# Altium PCB bluienrg.PcbDoc
Units mm, origin at the board's own origin, x right, y up, seen from the top; angles counter-clockwise.
Board outline 38.98 x 29.99 mm, 2 copper layers (Top Layer, Bottom Layer), stack 0.871 mm thick; 65 components, 38 nets, 201 pads, 216 vias.
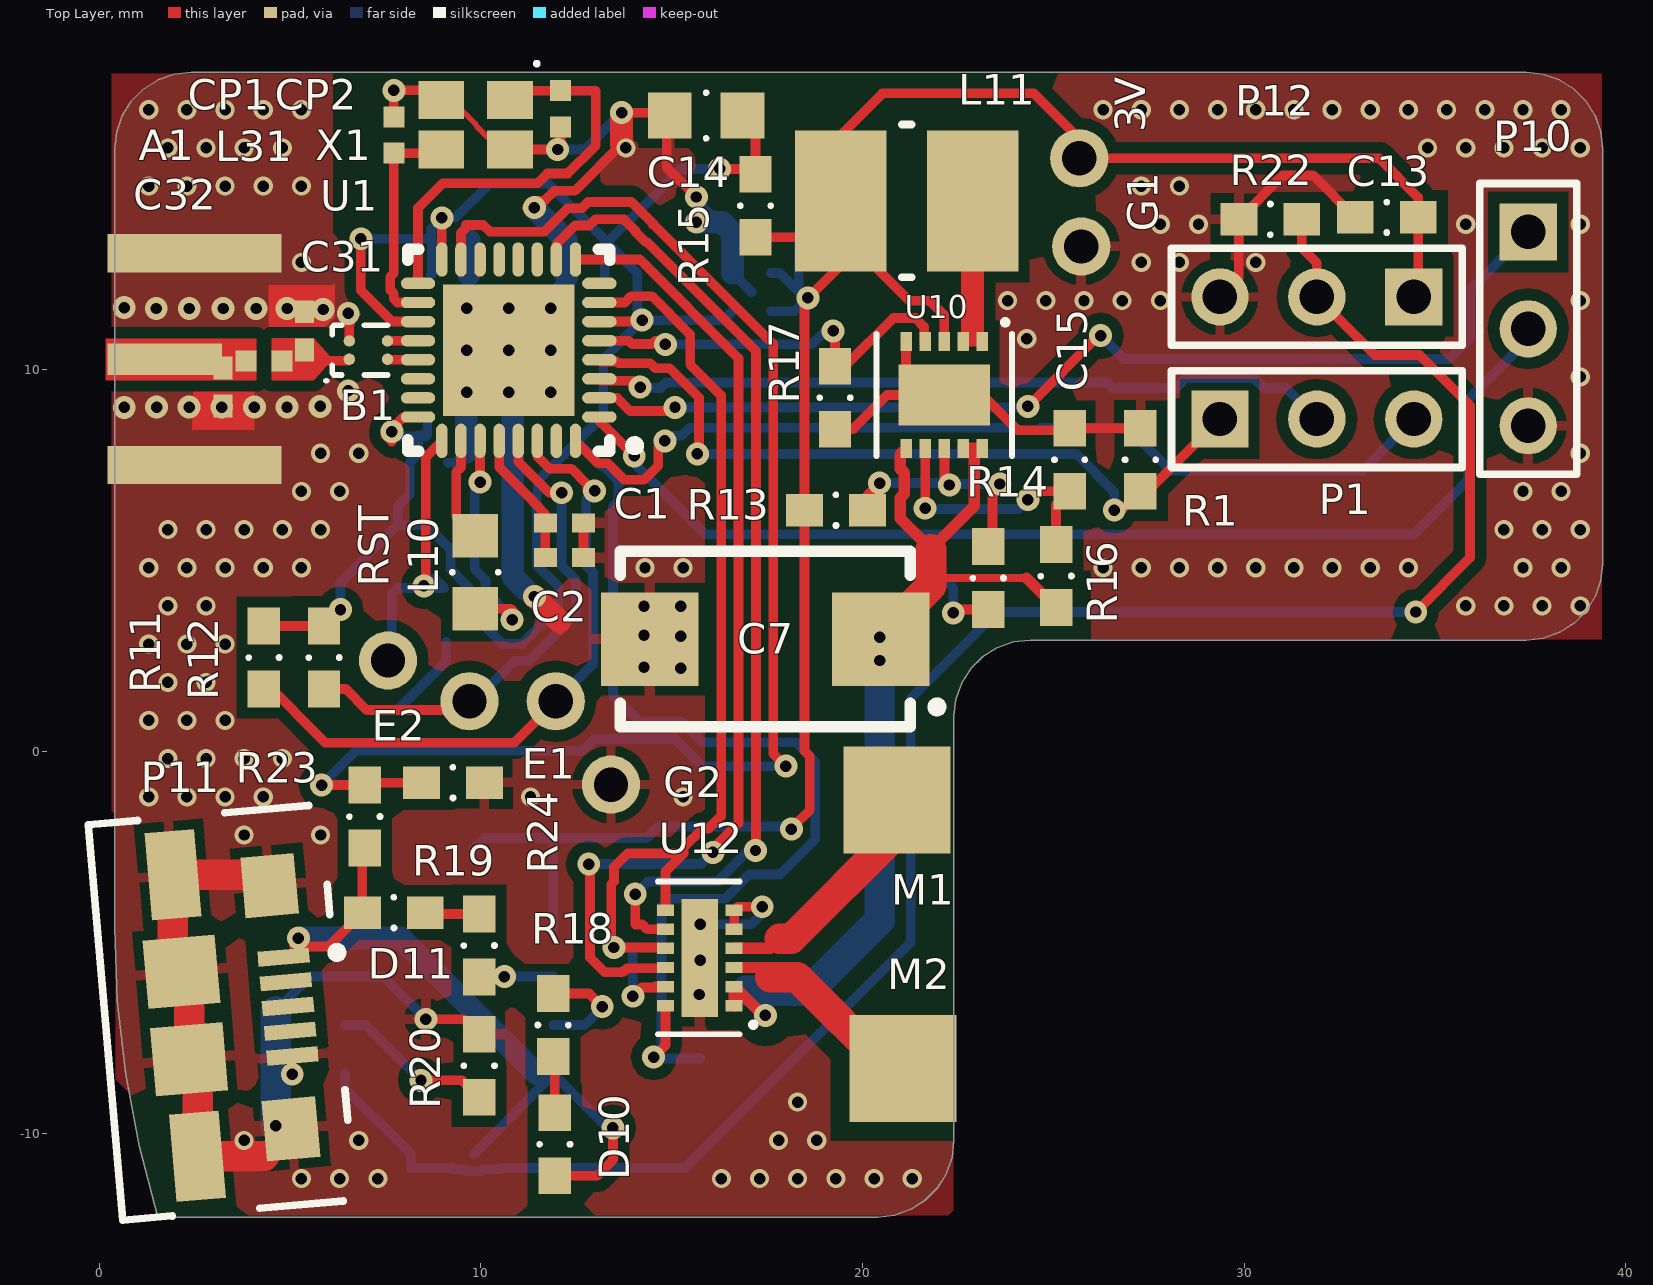
[diagram p0: Top Layer view]
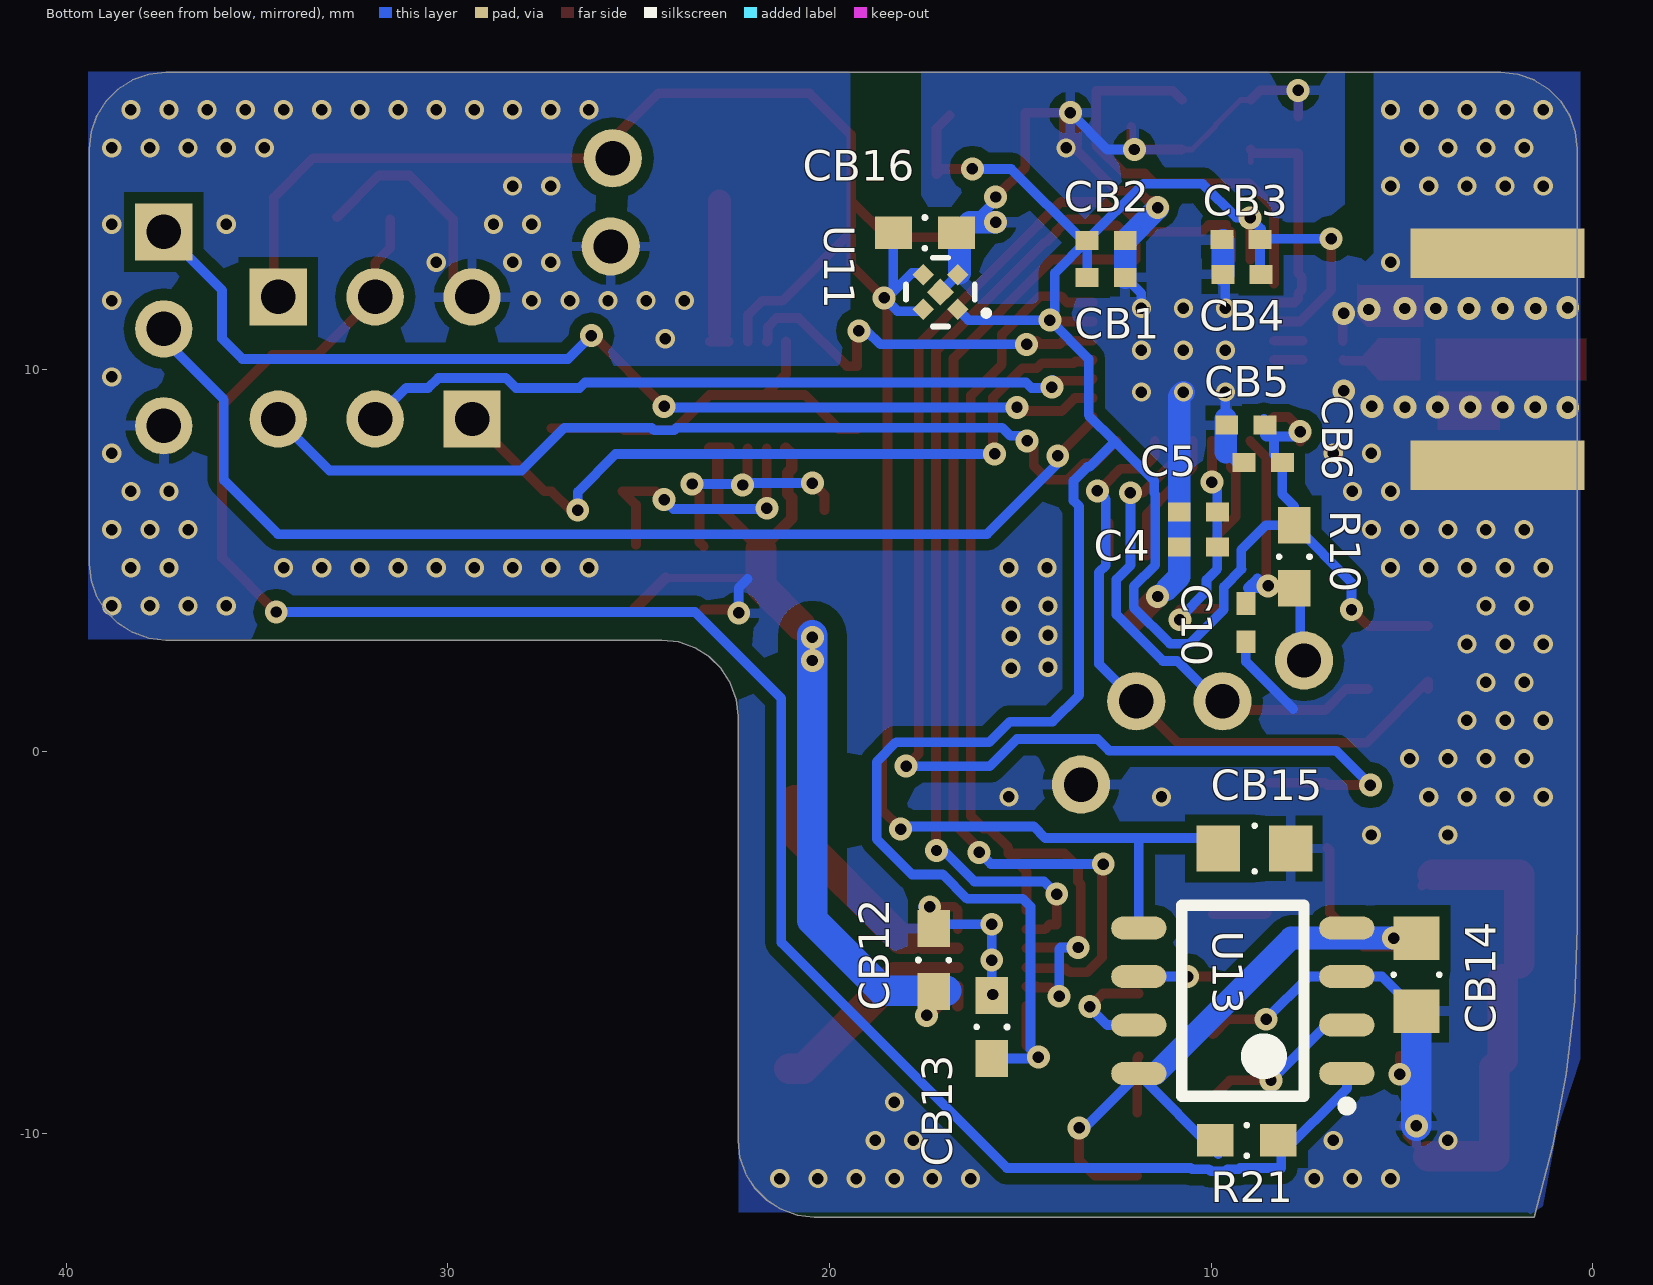
[diagram p1: Bottom Layer view, seen from below]

## Layer stack, top to bottom
Top Solder: solder mask 0.0102, Solder Resist, Dk 3.5
Top Layer: signal copper 0.0356
Dielectric 1: core 0.8, FR-4, Dk 4.31
Bottom Layer: signal copper 0.0356
Bottom Solder: solder mask 0.0102, Solder Resist, Dk 3.5

## Board outline
39.388,15.793 39.337,16.239 39.19,16.661 38.951,17.04 38.635,17.357 38.255,17.595 37.833,17.743 37.388,17.793 2.41,17.793 1.965,17.743 1.542,17.595 1.163,17.357 0.847,17.04 0.608,16.661 0.46,16.239 0.41,15.793 0.41,-4.617 0.481,-6.537 0.694,-8.446 1.047,-10.334 1.538,-12.192 20.396,-12.192 20.841,-12.141 21.264,-11.993 21.643,-11.755 21.959,-11.439 22.198,-11.059 22.346,-10.637 22.396,-10.192 22.396,0.923 22.446,1.368 22.594,1.791 22.832,2.17 23.149,2.487 23.528,2.725 23.951,2.873 24.396,2.923 37.388,2.923 37.833,2.974 38.255,3.122 38.635,3.36 38.951,3.676 39.19,4.056 39.337,4.478 39.388,4.923

## Design rules (kind name [scope] priority, off if disabled: settings)
Clearance Clearance_10 [HasFootprint('RT9078') vs HasFootprint('RT9078')] p1: gap=0.18 ignorepadtopadclearanceinfootprint=FALSE
Clearance Clearance_5 [HasFootprint('BALF-NRG') vs InPolygonClass('All Polygons')] p2: gap=0.5 ignorepadtopadclearanceinfootprint=FALSE
Clearance Clearance_6 [InNet('NetA1_ANT') vs InPolygonClass('All Polygons')] p3: gap=0.3 ignorepadtopadclearanceinfootprint=FALSE
Clearance Clearance_7 [InNetClass('HC') vs InPolygonClass('All Polygons')] p4: gap=0.5 ignorepadtopadclearanceinfootprint=FALSE
Clearance Clearance_9 [All vs InPolygonClass('All Polygons')] p5: gap=0.3 ignorepadtopadclearanceinfootprint=FALSE
Clearance Clearance_1 [InNet('NetA1_ANT')] p6: gap=0.1 ignorepadtopadclearanceinfootprint=FALSE
Clearance [InNetClass('RFB')] p7: gap=0.1 ignorepadtopadclearanceinfootprint=FALSE
Clearance Clearance_4 [HasFootprint('BALF-NRG')] p8: gap=0.2 ignorepadtopadclearanceinfootprint=FALSE
Clearance Clearance_3 [HasFootprint('MSOP-8')] p9: gap=0.2 ignorepadtopadclearanceinfootprint=FALSE
Clearance Clearance_2 [HasFootprint('BLUENRG-1')] p10: gap=0.15 ignorepadtopadclearanceinfootprint=FALSE
Clearance Clearance_8 [All] p11: gap=0.2 ignorepadtopadclearanceinfootprint=FALSE
MaxMinImpedance [InNetClass('AN')] p1: minimum=45.00 maximum=55.00
MinimumSolderMaskSliver MinimumSolderMaskSliver_3 [HasFootprint('RT9078') vs HasFootprint('RT9078')] p1: minsoldermaskwidth=0.18
MinimumSolderMaskSliver MinimumSolderMaskSliver_2 [HasFootprint('BALF-NRG')] p2: minsoldermaskwidth=0.02
MinimumSolderMaskSliver [HasFootprint('16MHZ_25_20')] p3: minsoldermaskwidth=0.12
MinimumSolderMaskSliver MinimumSolderMaskSliver_1 [All] p4: minsoldermaskwidth=0.195
PolygonConnect PolygonConnect_1 [HasFootprint('BlueNRG-1')] p1: connectstyle=Direct reliefconductorwidth=0.254 reliefentries=4 polygonreliefangle="90 Angle" airgapwidth=0.254
PolygonConnect PolygonConnect_4 [HasFootprint('sma')] p2: connectstyle=Direct reliefconductorwidth=0.254 reliefentries=4 polygonreliefangle="90 Angle" airgapwidth=0.254
PolygonConnect PolygonConnect_3 [IsShieldingVia] p3: connectstyle=Direct reliefconductorwidth=0.254 reliefentries=4 polygonreliefangle="90 Angle" airgapwidth=0.254
PolygonConnect PolygonConnect_2 [IsStitchingVia] p4: connectstyle=Direct reliefconductorwidth=0.254 reliefentries=4 polygonreliefangle="90 Angle" airgapwidth=0.254
PolygonConnect [All] p5: connectstyle=Relief reliefconductorwidth=0.254 reliefentries=4 polygonreliefangle="90 Angle" airgapwidth=0.254
RoutingCorners [InNetClass('AN')] p1: cornerstyle=Round minsetback=2.54 maxsetback=2.54
RoutingCorners RoutingCorners_1 [All] p2: cornerstyle=45-Degree minsetback=2.54 maxsetback=2.54
RoutingVias [All] p1: holewidth=0.3 width=0.6 viastyle="Through Hole" minholewidth=0.3 minwidth=0.6 maxholewidth=0.3 maxwidth=0.6
SMDNeckDown [InNet('NetA1_ANT')] p1: percent=600.000
SignalStimulus [All] p1: kind=1 level=0 starttime=10.00n stoptime=60.00n periodtime=100.00n
SilkToSilkClearance [All] p1: silktosilkclearance=0.19
SilkToSolderMaskClearance SilkToSolderMaskClearance_1 [HasFootprint('MY_0603')] p1: minsilkscreentomaskgap=0.1 clearancetoexposedcopper=TRUE
SilkToSolderMaskClearance SilkToSolderMaskClearance_2 [HasFootprint('MY_0805')] p2: minsilkscreentomaskgap=0.1 clearancetoexposedcopper=TRUE
SilkToSolderMaskClearance [IsPad] p3: minsilkscreentomaskgap=0.2 clearancetoexposedcopper=TRUE
SolderMaskExpansion [All] p1: expansion=0.102
SupplyNets SupplyNets_1 [InNet('VCC')] p1: voltage=3.000
SupplyNets [InNet('12V')] p2: voltage=12.00
Width [InNet('NetA1_ANT')] p1: maxlimit=1.706 minlimit=-0.044 preferedwidth=1.243 toplayer_minwidth=0.037 bottomlayer_maxwidth=-0.042 bottomlayer_prefwidth=-0.043 impedancedriven=TRUE minimp=40.000000 maximp=140.000000 favimp=50.000000
Width Width_2 [InNetClass('HC')] p2: maxlimit=0.8 minlimit=0.15 preferedwidth=0.3
Width Width_1 [All] p3: maxlimit=0.8 minlimit=0.15 preferedwidth=0.254
26 further rules are at their usual default settings.

## Classes and differential pairs
net class HC: 5V NetM1_1 NetM2_1
net class AN: NetA1_ANT NetB1_AN
net class RFB: NetB1_RF0 NetB1_RF1

## Components (designator, comment, footprint, x,y, rotation, side; value= is the part's Value field where it differs from the comment)
3V "ENC" MY_PAD 25.679,15.545 r0 top
A1 "ANTENNA" sma 2.5,10.281 r270 top
B1 "BALF-NRG" BALF-NRG 7.555,10.719 r180 top
C1 "100p C0G" 0402 12.192,5.994 r180 top value=100pF
C2 "100n" 0402 12.192,5.08 r180 top value=100pF
C4 "100n" 0402 10.338,5.359 r180 bottom value=100pF
C5 "1u" 0402 10.338,6.274 r180 bottom value=100pF
C7 "100uF" 100uf_tant 17.45,2.946 r180 top
C10 "100n" 0402 9.093,3.378 r90 bottom value=100pF
C13 "1u" MY_0603 33.731,13.995 r0 top value=100pF
C14 "10u" MY_0805 15.9,16.662 r0 top value=100pF
C15 "100nF" MY_0603 25.425,7.645 r270 top value=100pF
C31 "1.2pF" 0402 5.385,11.024 r90 top value=100pF
C32 "1.2pF" 0402 3.251,9.55 r270 top value=100pF
CB1 "1u" 0402 12.751,12.421 r0 bottom value=100pF
CB2 "100n" 0402 12.751,13.386 r0 bottom value=100pF
CB3 "1u" 0402 9.22,13.411 r180 bottom value=100pF
CB4 "100n" 0402 9.195,12.497 r180 bottom value=100pF
CB5 "1u" 0402 9.093,8.56 r180 bottom value=100pF
CB6 "100n" 0402 8.636,7.569 r180 bottom value=100pF
CB12 "100n" MY_0603 17.272,-5.461 r270 bottom value=100pF
CB13 "100n" MY_0603 15.748,-7.214 r90 bottom value=100pF
CB14 "10uF" MY_0805 4.623,-5.842 r90 bottom value=100pF
CB15 "10uF" MY_0805 8.865,-2.54 r0 bottom value=100pF
CB16 "0.1u" MY_0603 17.501,13.589 r0 bottom value=100pF
CP1 "13pF C0G" MY_0402 7.722,16.154 r270 top value=100pF
CP2 "13pF C0G" MY_0402 12.09,16.84 r90 top value=100pF
D10 "LED2" MY_0603 11.938,-10.287 r90 top
D11 "LED2" MY_0603 7.722,-4.216 r0 top
E1 "ENC" MY_PAD 11.963,1.321 r0 top
E2 "ENC" MY_PAD 9.703,1.321 r0 top
G1 "ENC" MY_PAD 25.73,13.233 r0 top
G2 "ENC" MY_PAD 13.411,-0.864 r0 top
L10 "Inductor" MY_0805 9.855,4.699 r270 top value=10nH
L11 "Inductor" IND_4_4 21.158,14.427 r0 top value=2.2uH
L31 "Inductor" MY_0402 4.318,10.236 r180 top value=2.2nH
M1 "M1" MPAD 20.904,-1.27 r0 top
M2 "M2" MPAD 21.057,-8.306 r0 top
P1 "DBG" HDR1X3 29.362,8.712 r0 top
P10 "SWD" HDR1X3 37.44,13.614 r270 top
P11 "USBmicroAB" 1981584 0.864,-7.036 r185 top
P12 "BAT" HDR1X3 34.442,11.913 r180 top
R1 "4.7k" MY_0603 27.28,7.645 r270 top value=4.7K
R10 "4.7k" MY_0603 7.823,5.105 r90 bottom value=4.7K
R11 "4.7k" MY_0603 4.318,2.464 r90 top value=4.7K
R12 "4.7k" MY_0603 5.893,2.464 r90 top value=4.7K
R13 "0R" MY_0603 19.304,6.325 r0 top value=4.7K
R14 "0R" MY_0603 23.292,4.547 r90 top value=4.7K
R15 "0R" MY_0603 17.196,14.3 r270 top value=4.7K
R16 "100R" MY_0603 25.07,4.597 r90 top value=4.7K
R17 "4.7k" MY_0603 19.279,9.271 r90 top value=4.7K
R18 "4.7k" MY_0603 11.894,-7.163 r270 top value=4.7K
R19 "4.7k" MY_0603 9.957,-5.08 r90 top value=4.7K
R20 "2.2k" MY_0603 9.957,-8.23 r90 top value=4.7K
R21 "4.7k" MY_0603 9.068,-10.185 r180 bottom value=4.7K
R22 "56k" MY_0603 30.683,13.945 r180 top value=4.7K
R23 "56k" MY_0603 6.96,-1.702 r90 top value=4.7K
R24 "56k" MY_0603 9.271,-0.813 r0 top value=4.7K
RST "M1" MY_PAD 7.569,2.388 r0 top
U1 "BlueNRG-1" BlueNRG-1 10.73,10.516 r180 top
U10 "MAX8815A" PDQN10 23.139,10.744 r180 top
U11 "RT9078" RT9078 17.094,12.04 r0 bottom
U12 "DRV8839DSSR" DRV8839 16.637,-6.655 r90 top
U13 "TP4056" MY_SOIC8N 9.169,-6.528 r0 bottom
X1 "16MHZ" 16MHZ_25_20 9.866,16.423 r180 top

## Footprints (in the part's own frame and the unit in brackets; to place one, negate y for a bottom-side part, rotate by r counter-clockwise, add the part's x,y. Pads: shape width x height; smd on the part's side, far side on the other; paste and mask are expansions set on the pad)
16MHZ_25_20 [mm] "DFN, 4-Leads, Body 2.00x2.50mm, Pitch 1.70mm, IPC Medium Density"
  rect 1.2x1 smd mask+0.08: G1(0.9,-0.65) G2(-0.9,0.65) XT1(-0.9,-0.65) XT2(0.9,0.65)
  silkscreen extent -1.65,-1.65 -1.55,-1.55, body extent -1.3,-1.05 1.3,1.05, height 0.5
100uf_tant [mm]
  rect 2.55x2.45 smd: +(-3.025,0) -(3.025,0)
  silkscreen extent -4.63,-2.3 3.8,2.3, body extent -3.8,-2.3 3.8,2.3, height 2.8
0402 [mm] "Chip Capacitor, Body 1.0x0.5mm, IPC High Density"
  rect 0.6x0.5 smd: 1(-0.5,0) 2(0.5,0)
  body extent -0.55,-0.3 0.55,0.3, height 1.3
1981584 [mm] "Connector; USB2.0, Type B, SM; 5 Position; Right Angle"
  rect 1.35x0.4 smd mask+0: 1(-4.1,-1.3) 2(-4.1,-0.65) 3(-4.1,0) 4(-4.1,0.65) 5(-4.1,1.3)
  rect 1.4x1.6 smd: 6(-3.9,3.2) 8(-3.9,-3.2)
  rect 1.3x2.3 smd: 7(-1.4,3.7) 9(-1.4,-3.7)
  rect 1.9x1.8 smd: 10(-1.4,1.15) 11(-1.4,-1.15)
  silkscreen extent -5.62,-5.2 0.7,5.2, body extent -5.2,-5 0.6,4.95, height 3.9
BALF-NRG [mm]
  round 0.3 smd paste+0.1 mask+0.1: AN(1,0.44) G(1,-0.04) RF0(0,0.44) RF1(0,-0.04)
  silkscreen extent 0,-0.45 1.61,1
BlueNRG-1 [mm] "QFN, 32-Leads, Body 5.00x5.00mm, Pitch 0.50mm, Thermal Pad 3.45x3.45mm, IPC Medium Density"
  oval 0.9x0.3 smd: 1(-2.375,1.75) 2(-2.375,1.25) 3(-2.375,0.75) 4(-2.375,0.25) 5(-2.375,-0.25) 6(-2.375,-0.75) 7(-2.375,-1.25) 8(-2.375,-1.75) 17(2.375,-1.75) 18(2.375,-1.25) 19(2.375,-0.75) 20(2.375,-0.25) 21(2.375,0.25) 22(2.375,0.75) 23(2.375,1.25) 24(2.375,1.75)
  oval 0.3x0.9 smd: 9(-1.75,-2.375) 10(-1.25,-2.375) 11(-0.75,-2.375) 12(-0.25,-2.375) 13(0.25,-2.375) 14(0.75,-2.375) 15(1.25,-2.375) 16(1.75,-2.375) 25(1.75,2.375) 26(1.25,2.375) 27(0.75,2.375) 28(0.25,2.375) 29(-0.25,2.375) 30(-0.75,2.375) 31(-1.25,2.375) 32(-1.75,2.375)
  rect 3.45x3.45 smd: 33(0,0)
  silkscreen extent -3.42,-2.65 2.65,2.65, body extent -2.5,-2.5 2.5,2.5, height 0.8
DRV8839 [mm]
  rect 0.3x0.45 smd mask+0: EN1(1.5,1.8) EN2(2.5,1.8) G1(2,0) G2(2.5,0) IN1(1,1.8) IN2(2,1.8) nSLEEP(0.5,1.8) OUT1(1,0) OUT2(1.5,0) VCC(0,1.8) VM1(0,0) VM2(0.5,0)
  rect 3.1x0.95 smd mask+0: PG(1.25,0.9)
  silkscreen extent -0.75,-0.51 3.25,2
HDR1X3 [mm] "Connector; Header; 3 Position"
  rect 1.5x1.5 hole 0.9: 1(0,0)
  round 1.5 hole 0.9: 2(2.54,0) 3(5.08,0)
  silkscreen extent -1.27,-1.27 6.35,1.27
IND_4_4 [mm]
  rect 2.4x3.7 smd: 1(-1.725,0) 2(1.725,0)
  silkscreen extent -0.13,-2 0.12,2, body extent -2.27,-2 2.27,2, height 2.5
MPAD [mm]
  rect 2.8x2.8 smd: 1(0,0)
MY_0402 [mm] "Chip Resistor, 2-Leads, Body 1.00x0.50mm, IPC Medium Density"
  rect 0.55x0.55 smd mask+0: 1(-0.475,0) 2(0.475,0)
  body extent -0.5,-0.25 0.5,0.25, height 0.5
MY_0603 [mm] "0603 without silkscreen issues"
  rect 0.965x0.85 smd: 1(-0.825,0) 2(0.825,0)
  silkscreen extent -0.01,-0.41 0.01,0.41, body extent -0.8,-0.4 0.8,0.4, height 3
MY_0805 [mm] "0805 without silkscreen issues"
  rect 1.14x1.2 smd: 1(-0.955,0) 2(0.955,0)
  silkscreen extent -0.01,-0.61 0.01,0.61, body extent -1,-0.6 1,0.6, height 4
MY_PAD [mil]
  round 60 hole 35.43: 1(0,0)
MY_SOIC8N [mm]
  oval 1.45x0.6 smd: 1(-2.725,1.905) 2(-2.725,0.635) 3(-2.725,-0.635) 4(-2.725,-1.905) 5(2.725,-1.905) 6(2.725,-0.635) 7(2.725,0.635) 8(2.725,1.905)
  silkscreen extent -2.85,-2.5 1.6,2.88, body extent -2,-2.5 2,2.5, height 2.65
PDQN10 [mm]
  rect 0.3x0.5 smd mask+0: 1(0,0) 2(0.5,0) 3(1,0) 4(1.5,0) 5(2,0) 6(2,2.8) 7(1.5,2.8) 8(1,2.8) 9(0.5,2.8) 10(0,2.8)
  rect 2.4x1.6 smd mask+0: 11(1,1.4)
  silkscreen extent -0.77,-0.51 2.77,3
RT9078 [mm] "DFN, 4-Leads, Body 1.00x1.00mm, Pitch 0.63mm, IPC Medium Density"
  rect 0.4x0.4 smd rot 45 mask+0: EN(0.45,-0.45) GND(-0.45,-0.45) VIN(0.45,0.45) VOUT(-0.45,0.45)
  rect 0.5x0.5 smd rot 45 mask+0: SGND(0,0)
  silkscreen extent -1.25,-0.9 0.9,0.9, body extent -0.5,-0.5 0.5,0.5, height 0.45
sma [mm]
  rect 0.82x3 smd: ANT(0,-0.78)
  rect 1x4.56 smd: G1(-2.775,0) G2(2.775,0)
  rect 1.3x4.56 smd far side: G1(-2.775,0) G2(2.775,0)

## Part data
3V E1 E2 G1 G2 M1 M2 RST: library part Socket, "Socket", LatestRevisionDate=17-Jul-2002, LatestRevisionNote="Re-released for DXP Platform.", Publisher="Altium Limited"
C1 C2 C4 C5 C10 C13 C14 C15 C31 C32 CB1 CB2 CB3 CB4 CB5 CB6 CB12 CB13 CB14 CB15 CB16 CP1 CP2: library part "Cap Semi", "Capacitor (Semiconductor SIM Model)", LatestRevisionDate=29-May-2009, LatestRevisionNote="IPC-7351 Footprint Added.", PackageDescription="Chip Capacitor", PackageReference=C1206, Published=8-Jun-2000, Publisher="Altium Limited"
C7: library part C_TANT
D10 D11: "Typical RED, GREEN, YELLOW, AMBER GaAs LED", LatestRevisionDate=17-Jul-2002, LatestRevisionNote="Re-released for DXP Platform.", PackageDescription="SM LED; 2 Flat Leads", PackageReference=3.2X1.6X1.1, PackageVersion=Feb-2002, Published=8-Jun-2000, Publisher="Altium Limited"
P1 P10 P12: library part "Header 3", "Header, 3-Pin", LatestRevisionDate=17-Jul-2002, LatestRevisionNote="Re-released for DXP Platform.", Publisher="Altium Limited"
R1 R10 R11 R12 R13 R14 R15 R16 R17 R18 R19 R20 R21 R22 R23 R24: library part Res3, "Resistor", LatestRevisionDate=29-May-2009, LatestRevisionNote="IPC-7351 Footprint Added.", PackageDescription="Chip Resistor", PackageReference=J1-0603, Published=8-Jun-2000, Publisher="Altium Limited"
U1: Supplier Part Number 1=2785121, Supplier 1=Farnell
X1: library part XTAL_4PIN
L10 L11 L31: Code_IEC=1005, Code_JEITA=0402, LatestRevisionDate=29-May-2009, LatestRevisionNote="IPC-7351 Footprint Added.", PackageDescription="Chip Inductor", PackageReference=0402-A, Published=8-Jun-2000, Publisher="Altium Limited"

## Via types
v1: diameter 0.5, hole 0.3, Top Layer to Bottom Layer, tented both sides, 130 vias
v2: diameter 0.6, hole 0.3, Top Layer to Bottom Layer, tented both sides, 77 vias
v3: diameter 0.5, hole 0.3, Top Layer to Bottom Layer, 9 vias

## Nets (pads, with @x,y where several pads share a name; then routed paths per layer and width w, separated by ;. In a path a pad name is that pad's centre, name@x,y a point inside that pad or via, vN(x,y) a via of type N, cw(c..) or ccw(c..) an arc to the next point about the centre after c; other vN are vias at no path point)
5V: C7.+ CB12.2 R16.1 U10.6 U10.9 U10.10 U12.VM1 U12.VM2 | length 27.3
  Top Layer w0.16: 21.793,4.341 21.793,4.547
  Top Layer w0.2: 21.793,4.547 24.296,4.547
  Top Layer w0.3: U12.VM1 U12.VM2 17.456,-6.974 v2(17.456,-6.909) ; U10.6 20.989,7.794 20.989,7.413 21.097,7.305 21.097,6.754 20.989,6.646 20.989,6.108 21.793,5.304 22.926,6.436 22.926,7.899 ; U10.9 U10.10 ; 24.296,4.547 R16.1
  Top Layer w0.8: C7.+@20.766,3.313 21.793,4.341 ; 21.793,4.484 21.793,5.304
  Bottom Layer w0.3: CB12.2@16.942,-6.261 17.59,-6.909 v2(17.456,-6.909)
  Bottom Layer w0.8: CB12.2@16.942,-6.261 18.605,-6.261 20.447,-4.419 v2@20.447,3.048
  other v2: 20.447,2.388 20.447,2.995
BL_ENTER: P1.1 R1.2 U1.4 | length 20.1
  Top Layer w0.254: U1.4 13.151,10.22 13.555,10.22 13.601,10.174 13.91,10.174 13.913,10.177 14.437,10.177 14.574,10.041 14.95,10.041 15.715,9.277 15.715,7.841 v2(15.672,7.798) ; v2(26.594,6.325) 26.784,6.325 R1.2 27.471,6.82 P1.1
  Bottom Layer w0.254: v2(15.672,7.798) 25.603,7.798 26.594,6.807 v2(26.594,6.325)
BL_RXD: P1.3 U1.32 | length 24.3
  Top Layer w0.254: U1.32 13.069,7.552 13.329,7.552 13.761,7.12 14.281,7.12 14.648,7.487 14.648,7.968 v2(14.821,8.141)
  Bottom Layer w0.254: v2(14.821,8.141) 14.951,8.271 15.258,8.271 15.471,8.484 24.005,8.484 24.073,8.415 24.593,8.415 24.661,8.484 26.949,8.484 28.067,7.366 33.096,7.366 P1.3
BL_TXD: P1.2 U1.3 | length 19.9
  Top Layer w0.254: U1.3 13.151,9.72 14.004,9.72 v2(14.173,9.55)
  Bottom Layer w0.254: v2(14.173,9.55) 14.173,9.703 14.148,9.728 14.158,9.738 14.371,9.525 14.709,9.525 14.853,9.669 26.406,9.669 26.55,9.525 28.213,9.525 28.477,9.789 30.248,9.789 30.512,9.525 31.09,9.525 P1.2
CHR: R23.2 R24.1 U1.15 | length 37.8
  Top Layer w0.254: v2(5.83,-0.877) R23.2 7.024,-0.813 R24.1 ; U1.15 9.48,13.594 9.607,13.721 9.607,13.798 10.06,13.798 10.236,13.622 11.664,13.622 12.28,14.238 12.65,14.238 12.81,14.399 13.941,14.399 14.509,13.831 14.509,13.799 14.541,13.799 17.661,10.679 17.661,-0.051 v2(17.991,-0.381)
  Bottom Layer w0.254: v2(5.83,-0.877) 6.732,0.025 12.675,0.025 12.979,0.33 15.088,0.33 15.799,-0.381 v2(17.991,-0.381)
E1: E1.1 R11.1 U1.30 | length 17.4
  Top Layer w0.254: R11.1 4.318,1.844 5.93,0.232 10.874,0.232 E1.1 ; U1.30 11.48,7.736 11.803,7.414 12.371,7.414 12.788,6.996 12.788,6.833 v2(12.979,6.833)
  Bottom Layer w0.254: E1.1 12.94,2.297 12.94,4.7 12.762,4.878 12.762,6.615 v2(12.979,6.833)
E2: E2.1 R12.1 U1.29 | length 13.6
  Top Layer w0.254: R12.1 6.464,1.639 7.01,1.092 9.474,1.092 E2.1 ; U1.29 10.98,7.594 11.793,6.782 v2(12.116,6.782)
  Bottom Layer w0.254: E2.1 E2.1@9.835,1.321 ; E2.1@10.236,1.321 E2.1@9.835,1.321 ; v2(12.116,6.782) 12.116,4.882 12.486,4.512 12.486,3.591 11.268,2.373 10.887,2.373 E2.1@9.835,1.321
EN: R17.2 U1.5 U10.4 | length 10.7
  Top Layer w0.254: U1.5 13.875,10.766 13.964,10.676 14.484,10.676 14.573,10.766 14.736,10.766 v2(14.834,10.668) ; v2(19.228,11.024) 19.279,10.973 R17.2 19.545,10.096 20.806,11.357 21.389,11.357 21.616,11.13 21.616,10.767 U10.4
  Bottom Layer w0.254: v2(14.834,10.668) 18.669,10.668 19.025,11.024 v2(19.228,11.024)
GND: A1.G1 A1.G2 B1.G C1.1 C2.1 C4.1 C5.1 C7.- C10.1 C13.1 C14.1 C15.1 C31.2 C32.2 CB1.1 CB2.1 CB3.1 CB4.1 CB5.1 CB6.1 CB12.1 CB13.2 CB14.1 CB15.1 CB16.1 CP1.1 CP2.1 G1.1 G2.1 P10.3 P11.5 P11.6 P11.7 P11.8 P11.9 P11.10 P11.11 P12.3 R1.1 R14.1 R17.1 R20.2 R22.2 R24.2 U1.33 U10.5 U10.11 U11.GND U11.SGND U12.G1 U12.G2 U12.PG U13.3 X1.G1 X1.G2 | length 85.5
  Top Layer w0.15: X1.G1 9.231,17.073 9.862,16.443 ; 9.895,16.379 10.501,15.773 X1.G2
  Top Layer w0.254: P11.11@1.936,-5.546 P11.11 P11.11@2.359,-5.969 ; P11.10 P11.10@2.581,-8.282 ; P11.8@4.19,-3.228 P11.8 ; 4.312,-10.6 P11.6@4.865,-10.046 ; v2(4.623,-9.804) P11.6@4.948,-9.804 ; v2(5.061,-8.451) P11.5 ; B1.G 6.555,11.204 v2@6.579,11.227 ; CP1.1 v2(7.722,17.323) 8.717,17.323 X1.G1 ; v2(8.56,-7.01) 9.563,-7.01 R20.2 ; X1.G2 v2(12.014,15.773) 12.09,15.85 CP2.1 ; v2(11.405,14.249) 11.201,14.249 11.385,14.433 11.671,14.433 11.931,14.692 12.462,14.692 v1@13.691,15.921 ; 12.065,3.2 12.065,3.404 ; C2.1@12.692,5.131 C1.1 ; v2(13.691,16.739) 14.869,16.739 14.869,15.306 v2(15.646,14.529) ; v2(15.748,-5.461) U12.PG@15.748,-5.416 ; U12.G1 U12.G2 16.728,-4.064 v2(17.374,-4.064) ; R17.1 19.749,8.446 20.647,9.344 U10.11@21.682,9.344 ; U10.5 21.139,9.887 U10.11@21.682,9.344 ; v2(22.377,3.632) 22.377,3.683 22.416,3.722 R14.1 ; R1.1 C15.1 25.37,8.415 24.073,8.415 23.145,9.344 U10.11 U10.11@21.682,9.344 ; P12.3 29.858,12.408 R22.2 31.004,15.091 31.811,15.091 C13.1
  Top Layer w0.6: v2(11.405,4.064) 12.065,3.404 ; v1@13.691,15.921 v2(13.691,16.739)
  Top Layer w0.8: P11.11@1.936,-5.546 P11.9 P11.8@4.19,-3.228 ; P11.10 P11.11@2.359,-5.969 ; P11.10@2.581,-8.282 P11.7 4.312,-10.6
  Bottom Layer w0.254: 4.623,-8.89 v2(5.061,-8.451) ; CB14.1 5.527,-5.893 U13.3 7.442,-5.893 v2(8.56,-7.01) ; 7.849,1.118 9.093,2.362 C10.1 ; CB6.1 9.339,7.569 9.619,7.849 ; CB5.1@9.619,8.712 9.63,8.724 v3(9.63,9.416) ; v3(9.63,11.616) 9.63,12.432 CB4.1 ; CB3.1@9.695,13.386 CB3.1 ; v2@11.176,4.242 11.354,4.064 v2(11.405,4.064) ; v2@11.405,14.232 v2(11.405,14.249) ; v3(11.83,11.616) 11.83,12 CB1.1 ; v2(12.014,15.773) 12.725,15.773 v2(13.691,16.739) ; v2(15.646,13.868) 16.219,13.868 15.723,14.365 15.723,14.453 v2(15.646,14.529) ; v2(15.723,-6.363) CB13.2 v2(15.748,-5.461) ; v2@15.748,-5.416 v2(15.748,-4.521) 17.094,-4.521 17.551,-4.064 v2(17.374,-4.064) ; U11.GND@16.594,12.54 U11.SGND ; 22.149,4.521 22.377,4.293 v2(22.377,3.632)
  Bottom Layer w0.6: 9.619,7.849 CB5.1@9.619,8.712 ; CB4.1 CB3.1@9.695,13.386 ; v3(10.73,9.416) 10.838,9.308 C5.1 C4.1 10.838,4.58 v2@11.176,4.242 ; v2@11.405,14.232 CB2.1 CB1.1 ; v2(15.646,13.868) 16.315,13.868 16.594,13.589 U11.GND@16.594,12.54
  Bottom Layer w0.8: v2(4.623,-9.804) 4.623,-8.89 CB14.1
  other v1: 5.302,-11.184 6.302,-11.184 7.302,-11.184 16.302,-11.184 17.302,-11.184 18.302,-11.184 19.302,-11.184 20.302,-11.184 21.302,-11.184 3.802,-10.184 6.802,-10.184 17.802,-10.184 18.802,-10.184 18.302,-9.184 3.802,-2.184 5.802,-2.184 1.302,-1.184 2.302,-1.184 3.302,-1.184 4.302,-1.184 11.302,-1.184 15.302,-1.184 1.802,-0.184 2.802,-0.184 3.802,-0.184 4.802,-0.184 1.302,0.816 2.302,0.816 3.302,0.816 1.802,1.816 2.802,1.816 15.24,2.184 14.275,2.21 1.302,2.816 2.302,2.816 3.302,2.816 15.24,3.023 14.275,3.048 1.802,3.816 2.802,3.816 14.275,3.81 15.24,3.81 35.802,3.816 36.802,3.816 37.802,3.816 38.802,3.816 1.302,4.816 2.302,4.816 3.302,4.816 4.302,4.816 5.302,4.816 14.302,4.816 15.302,4.816 26.302,4.816 27.302,4.816 28.302,4.816 29.302,4.816 30.302,4.816 31.302,4.816 32.302,4.816 33.302,4.816 34.302,4.816 37.302,4.816 38.302,4.816 1.802,5.816 2.802,5.816 3.802,5.816 4.802,5.816 5.802,5.816 36.802,5.816 37.802,5.816 38.802,5.816 5.302,6.816 6.302,6.816 37.302,6.816 38.302,6.816 5.802,7.816 6.802,7.816 38.802,7.816 38.802,9.816 24.302,10.816 23.802,11.816 24.802,11.816 25.802,11.816 26.802,11.816 27.802,11.816 38.802,11.816 5.302,12.816 27.302,12.816 28.302,12.816 30.302,12.816 27.802,13.816 28.802,13.816 35.802,13.816 38.802,13.816 1.302,14.816 2.302,14.816 3.302,14.816 4.302,14.816 5.302,14.816 27.302,14.816 28.302,14.816 1.802,15.816 2.802,15.816 3.802,15.816 4.802,15.816 13.802,15.816 34.802,15.816 35.802,15.816 36.802,15.816 37.802,15.816 38.802,15.816 1.302,16.816 2.302,16.816 3.302,16.816 4.302,16.816 5.302,16.816 26.302,16.816 27.302,16.816 28.302,16.816 29.302,16.816 30.302,16.816 31.302,16.816 32.302,16.816 33.302,16.816 34.302,16.816 35.302,16.816 36.302,16.816 37.302,16.816 38.302,16.816
  other v2: 0.66,9.017 1.506,9.026 2.36,9.026 3.214,9.026 4.068,9.026 4.922,9.026 5.791,9.042 6.528,9.449 6.528,11.481 5.867,11.582 1.499,11.608 2.362,11.608 3.251,11.608 4.115,11.608 4.928,11.608 0.66,11.633
  other v3: 11.83,9.416 9.63,10.516 10.73,10.516 11.83,10.516 10.73,11.616
IN1: U1.9 U12.IN1 | length 26.7
  Top Layer w0.254: U1.9 14.165,12.891 16.753,10.303 16.753,-1.872 v2@15.94,-2.685 ; v2@12.861,-2.946 12.861,-5.392 13.252,-5.782 13.688,-5.782 13.711,-5.759 13.748,-5.759 13.829,-5.678 14.814,-5.678 U12.IN1
  Bottom Layer w0.254: v2(12.827,-2.946) 15.773,-2.946 v2(16.078,-2.642) v2@16.078,-2.651
IN2: U1.10 U12.IN2 | length 25.7
  Top Layer w0.254: U1.10 11.98,13.294 12.47,13.784 12.838,13.784 12.998,13.945 13.753,13.945 14.055,13.643 14.055,13.611 14.321,13.345 14.353,13.345 17.207,10.491 v2@17.207,-2.591 ; v2(14.046,-3.734) 14.046,-4.521 14.053,-4.528 14.231,-4.528 14.358,-4.655 U12.IN2
  Bottom Layer w0.254: v2(14.046,-3.734) 14.38,-3.4 16.206,-3.4 17.016,-2.591 v2(17.196,-2.591)
MEN: U1.7 U12.EN1 U12.EN2 U12.nSLEEP | length 27.5
  Top Layer w0.15: U1.7 U1.7@13.109,11.769
  Top Layer w0.254: U1.7 13.774,11.766 13.939,11.93 14.484,11.93 15.486,10.928 15.486,10.147 16.299,9.335 16.299,-1.684 15.969,-2.015 15.818,-2.015 15.316,-2.517 15.316,-2.667 ; v2@13.983,-6.413 v2(13.983,-6.409) 14.214,-6.178 14.814,-6.178 U12.nSLEEP 14.575,-6.155 ; U12.EN1 14.814,-5.132 v2(13.488,-5.132) 13.419,-5.063 13.419,-3.474 13.488,-3.405 13.488,-3.022 13.843,-2.667 15.316,-2.667 ; U12.EN2 14.837,-3.146 15.316,-2.667
  Bottom Layer w0.254: v2(13.488,-5.132) 13.948,-5.132 13.983,-5.166 v2(13.983,-6.409)
NetA1_ANT: A1.ANT C32.1 L31.2
NetB1_AN: B1.AN C31.1 L31.1 | length 1.8
  Top Layer w0.254: L31.1 6.513,10.236 B1.AN@6.541,10.265
NetB1_RF0: B1.RF0 U1.21 | length 0.7
  Top Layer w0.254: B1.RF0@7.609,10.266 U1.21
NetB1_RF1: B1.RF1 U1.20 | length 0.8
  Top Layer w0.254: B1.RF1@7.602,10.766 U1.20
NetC1_2: C1.2 C2.2 U1.28 | length 3.5
  Top Layer w0.254: U1.28 10.48,7.452 11.387,6.545 11.387,6.522 11.692,6.217 C1.2 C2.2@11.692,5.131
NetC4_2: C4.2 C5.2 L10.2 U1.27 | length 6.4
  Top Layer w0.254: L10.2 10.785,3.744 10.846,3.683 10.82,3.658 v2(10.82,3.454) ; U1.27 9.98,7.063 v2(9.982,7.061)
  Bottom Layer w0.254: v2(9.982,7.061) 9.947,7.061 9.838,6.952 C5.2 C4.2 9.838,4.788 10.124,4.502 10.124,4.201 10.82,3.505 v2(10.82,3.454)
NetC15_2: C15.2 R16.2 U10.7 | length 7.1
  Top Layer w0.254: v2(21.639,6.377) U10.7 ; v2(24.333,6.604) 24.55,6.82 C15.2 25.07,6.465 R16.2
  Bottom Layer w0.254: v2(21.639,6.377) 21.658,6.358 24.087,6.358 v2(24.333,6.604)
NetCB14_2: CB14.2 D10.1 D11.1 P11.1 R21.1 R23.1 U13.4 U13.8 | length 19.9
  Top Layer w0.254: v2(5.222,-4.887) 5.222,-4.996 5.113,-5.105 6.008,-5.105 D11.1 6.897,-2.59 R23.1 ; D10.1 13.043,-11.112 13.462,-10.693 v2(13.462,-9.855)
  Bottom Layer w0.254: R21.1@9.817,-10.541 11.894,-8.463 U13.8 ; U13.8@11.455,-8.433 U13.8 ; v2(13.462,-9.855) 13.317,-9.855 U13.8
  Bottom Layer w0.6: v2(5.222,-4.887) 7.91,-4.887 U13.8@11.455,-8.433
NetCP1_2: CP1.2 U1.18 X1.XT2 | length 6.2
  Top Layer w0.15: X1.XT2@8.966,15.44 X1.XT2
  Top Layer w0.254: U1.18 7.818,11.766 7.722,11.862 7.722,11.996 7.628,12.089 7.628,12.442 7.722,12.536 CP1.2 8.872,15.679 X1.XT2
NetCP2_2: CP2.2 U1.17 X1.XT1 | length 11.1
  Top Layer w0.254: U1.17 8.353,12.268 8.353,14.241 8.999,14.887 11.483,14.887 11.743,15.146 12.274,15.146 13.012,15.885 13.012,17.315 CP2.2 11.008,17.315 X1.XT1
NetD10_2: D10.2 R18.2 | length 1.5
  Top Layer w0.254: R18.2 11.938,-8.031 D10.2
NetD11_2: D11.2 R19.2 | length 1.4
  Top Layer w0.254: D11.2 8.585,-4.255 R19.2
NetL10_1: L10.1 U1.26 | length 2.7
  Top Layer w0.254: U1.26 9.48,7.446 9.355,7.321 9.355,6.154 L10.1
NetL11_2: L11.2 U10.1 U10.2 | length 4.3
  Top Layer w0.254: 22.883,10.988 U10.2 U10.1
  Top Layer w0.6: 22.883,10.988 L11.2
NetM1_1: M1.1 U12.OUT2 | length 6.4
  Top Layer w0.3: U12.OUT2 17.578,-5.155 17.831,-4.902
  Top Layer w0.8: 17.831,-4.902 18.136,-4.902 20.904,-2.134 M1.1
NetM2_1: M2.1 U12.OUT1 | length 5.4
  Top Layer w0.3: U12.OUT1 17.578,-5.655
  Top Layer w0.8: 17.578,-5.905 18.284,-5.905 20.685,-8.306 M2.1
NetP12_2: P12.2 R21.2 R22.1 U13.1 | length 52.8
  Top Layer w0.254: R22.1 31.508,13.196 31.902,12.802 P12.2 33.426,10.389 34.595,10.389 35.916,9.068 35.916,5.08 v2(34.493,3.658)
  Bottom Layer w0.254: U13.1 6.444,-8.819 8.167,-10.541 8.167,-10.91 9.247,-10.91 9.275,-10.937 9.571,-10.937 9.629,-10.995 10.005,-10.995 10.062,-10.937 10.511,-10.937 10.538,-10.91 15.354,-10.91 21.26,-5.004 21.26,1.397 23.52,3.658 v2(34.493,3.658)
NetR13_2: R13.2 R14.2 U10.8 | length 6.7
  Top Layer w0.254: R13.2 20.129,6.718 v2(20.447,7.036) ; U10.8 22.149,7.935 22.149,6.909 22.225,6.985 v2(22.276,6.985) ; R14.2 23.403,5.483 23.403,6.766
  Bottom Layer w0.254: v2(20.447,7.036) 22.225,7.036 v2(22.276,6.985) 22.301,7.01 v2(23.597,7.01)
NetR18_1: R18.1 U13.7 | length 2.9
  Top Layer w0.254: R18.1 12.84,-6.338 v2(13.183,-6.68)
  Bottom Layer w0.254: U13.7 12.725,-7.163 13.183,-6.706 v2(13.183,-6.68)
NetR19_1: R19.1 U13.6 | length 1.9
  Top Layer w0.254: R19.1 9.969,-5.893 v2(10.617,-5.893)
  Bottom Layer w0.254: v2(10.617,-5.893) U13.6
NetR20_1: R20.1 U13.2 | length 4.3
  Top Layer w0.254: v2(8.433,-8.611) 9.513,-8.611 R20.1
  Bottom Layer w0.254: U13.2 6.985,-7.163 v2(8.433,-8.611)
RESETN: C10.2 R10.1 RST.1 U1.25 | length 7.6
  Top Layer w0.254: v2(8.509,4.343) 8.56,4.343 8.56,7.72 U1.25
  Bottom Layer w0.254: RST.1@7.671,2.667 7.671,4.128 R10.1 7.827,4.285 9.042,4.285 8.788,4.539 8.593,4.343 v2(8.509,4.343)
SWDTCK: P10.1 U1.2 | length 27.9
  Top Layer w0.254: U1.2 13.571,9.266 13.913,8.923 14.994,8.923 v2(15.088,9.017) ; v2(24.333,9.042) 26.213,10.922 v2(26.238,10.897)
  Bottom Layer w0.254: v2@14.961,8.89 v2(15.088,9.017) 24.308,9.017 v2(24.333,9.042) ; v2(26.238,10.897) 26.848,10.287 35.382,10.287 35.916,10.82 35.916,12.09 P10.1
SWDTIO: P10.2 U1.1 | length 29.4
  Top Layer w0.254: U1.1 13.105,8.662 v2(14.021,7.747)
  Bottom Layer w0.254: v2(14.021,7.747) 14.021,7.544 15.867,5.698 34.45,5.698 35.865,7.112 35.865,9.22 37.44,10.795 P10.2
VBAT: 3V.1 C13.2 CB15.2 CB16.2 L11.1 P12.1 R13.1 R15.2 U10.3 U11.EN U11.VIN U13.5 | length 60.5
  Top Layer w0.254: R15.2 18.481,13.475 L11.1 ; v2(18.136,-2.032) 18.136,-2.007 18.618,-1.524 18.618,-0.121 18.479,0.018 R13.1 18.479,11.799 v2(18.567,11.887) 19.433,12.753 L11.1@19.433,13.612 ; U10.3 22.139,11.439 21.768,11.811 21.234,11.811 L11.1@19.433,13.612 ; P12.1 34.556,12.026 C13.2 34.556,14.517 33.528,15.545 3V.1 25.679,16.053 24.486,17.247 20.523,17.247 19.433,16.157 L11.1 ; L11.1@19.433,13.612 L11.1
  Bottom Layer w0.254: CB15.2 10.099,-2.261 14.351,-2.261 14.648,-1.964 18.067,-1.964 v2(18.136,-2.032) ; U13.5 11.894,-2.268 ; U11.VIN@17.594,11.54 18.22,11.54 v2(18.567,11.887) ; U11.EN@17.594,12.54 17.839,12.54 18.491,11.887 v2(18.567,11.887) ; CB16.2 18.326,12.129 v2(18.567,11.887)
VCC: C14.2 CB1.2 CB2.2 CB3.2 CB4.2 CB5.2 CB6.2 CB13.1 R10.2 R11.2 R12.2 R15.1 U1.6 U1.16 U1.19 U1.24 U11.VOUT U12.VCC | length 79.6
  Top Layer w0.254: R11.2 R12.2 v2(6.325,3.721) ; v2(6.858,13.437) 6.858,12.083 7.676,11.266 U1.19 ; v2(7.671,8.382) 7.671,8.124 7.504,8.291 7.633,8.42 7.978,8.766 U1.24 ; U1.16 v2(8.98,13.981) ; U1.6 14.187,11.266 v2(14.224,11.303) ; v2(14.529,-8.001) 14.837,-7.693 U12.VCC ; v2(16.256,15.265) 17.056,15.265 R15.1 17.196,16.322 C14.2
  Bottom Layer w0.254: v2(6.325,3.721) 6.325,4.432 R10.2 ; v2(6.858,13.437) CB3.2@8.695,13.437 ; v2(7.671,8.382) 7.671,8.28 7.645,8.255 8.357,8.255 ; CB5.2@8.619,8.712 8.593,8.687 CB5.2 8.593,8.288 ; CB4.2 8.72,12.522 CB3.2 CB3.2@8.695,13.437 ; 9.206,4.778 9.67,4.314 9.67,3.718 10.561,2.827 11.08,2.827 12.032,3.779 12.032,4.324 11.465,4.891 11.465,6.743 11.489,6.767 11.489,7.091 12.522,8.124 ; 9.211,4.782 9.211,5.29 8.571,5.93 R10.2 ; CB1.2 CB2.2 ; CB13.1 14.566,-8.039 v2(14.529,-8.001) 14.732,-7.798 14.732,-4.058 14.935,-3.854 16.394,-3.854 17.031,-3.218 17.837,-3.218 18.763,-2.292 18.763,-0.266 18.251,0.246 15.814,0.246 15.276,0.784 14.151,0.784 13.462,1.473 13.462,6.428 13.606,6.573 13.606,7.092 13.239,7.46 13.187,7.46 12.522,8.124 ; v2(16.256,15.265) 15.24,15.265 13.36,13.386 CB2.2 ; U11.VOUT@16.594,11.54 16.358,11.303 v2(14.224,11.303) ; R10.2 7.823,6.426 8.136,6.739 CB6.2 8.357,7.79 8.357,8.255 ; 8.357,8.255 8.56,8.255 8.593,8.288 ; 8.357,8.255 8.357,8.288 8.593,8.288 ; CB3.2@8.695,13.437 8.695,13.696 v2(8.98,13.981) 8.987,13.988 9.34,13.988 10.228,14.876 11.773,14.876 13.251,13.398 CB2.2 ; 12.522,8.124 13.208,8.81 13.208,10.287 v2(14.224,11.303) ; CB2.2 14.097,12.54 14.097,11.43 v2(14.224,11.303)
pads on no net: P11.2 P11.3 P11.4 U1.8 U1.11 U1.12 U1.13 U1.14 U1.22 U1.23 U1.31

## Polygon pours and split planes (outlines as drawn)
GND on Top Layer "Bottom Overlay-No Net" (solid, remove dead copper, pour order 6): 0.33,17.755 39.37,17.755 39.37,2.946 23.546,2.946 22.377,1.778 22.377,-12.014 22.25,-12.141 1.702,-12.141 1.397,-11.836 1.397,-9.55 0.432,-8.585 0.432,-1.651 0.33,-1.549
GND on Bottom Layer "Bottom Overlay-No Net" (solid, remove dead copper, pour order 8): 0.33,17.805 39.421,17.805 39.421,2.946 23.622,2.946 23.622,2.845 22.377,1.6 22.377,-12.065 1.702,-12.065 1.575,-12.192 1.321,-11.938 0.941,-9.935 0.33,-8.052

## Other copper
Top Layer:
  pour cut-out: 7.366,17.932 7.366,13.894 6.706,13.894 6.375,13.564 6.121,13.564 6.121,17.932 6.147,17.958
  region net GND: 2.464,9.423 4.064,9.423 4.064,8.433 2.464,8.433 2.438,8.407
  region net GND: 4.445,11.126 5.924,11.126 6.172,11.374 6.172,12.268 6.121,12.217 4.445,12.217
  region net NetA1_ANT: 4.115,10.82 0.178,10.82 0.178,9.728 4.115,9.728
  pour cut-out: 7.01,17.704 7.112,17.602 7.112,14.986 12.776,14.986 12.852,14.91 12.979,15.037 12.979,17.882 7.29,17.882
  region net NetB1_AN: 6.067,10.332 5.621,10.832 4.521,10.832 4.521,9.732 5.621,9.732 6.067,10.232
Bottom Layer:
  pour cut-out: 17.678,17.882 17.594,17.797 17.594,11.59 18.618,10.566 19.456,10.566 19.456,17.755 19.583,17.882
  pour cut-out: 5.74,17.805 5.74,13.056 5.969,12.827 6.147,13.005 6.502,13.005 6.502,17.805 6.629,17.932

## Silkscreen, mask and mechanical layers (free items; w line width, h text height)
Mechanical 1:
  drawing of 165 lines, arcs and shapes, not listed

## Text inside footprints (layer, text, board x,y; h text height)
P11: Mechanical 1 "PCB Edge" at 0.081,-3.052 h0.25 r275